# Altium PCB charging-module.PcbDoc
Units mil, origin at the board's own origin, x right, y up, seen from the top; angles counter-clockwise.
Board outline 1935 x 1545 mil, 2 copper layers (Top Layer, Bottom Layer); 35 components, 24 nets, 143 pads, 27 vias.
Unrouted connection lines stored in the file: 28.
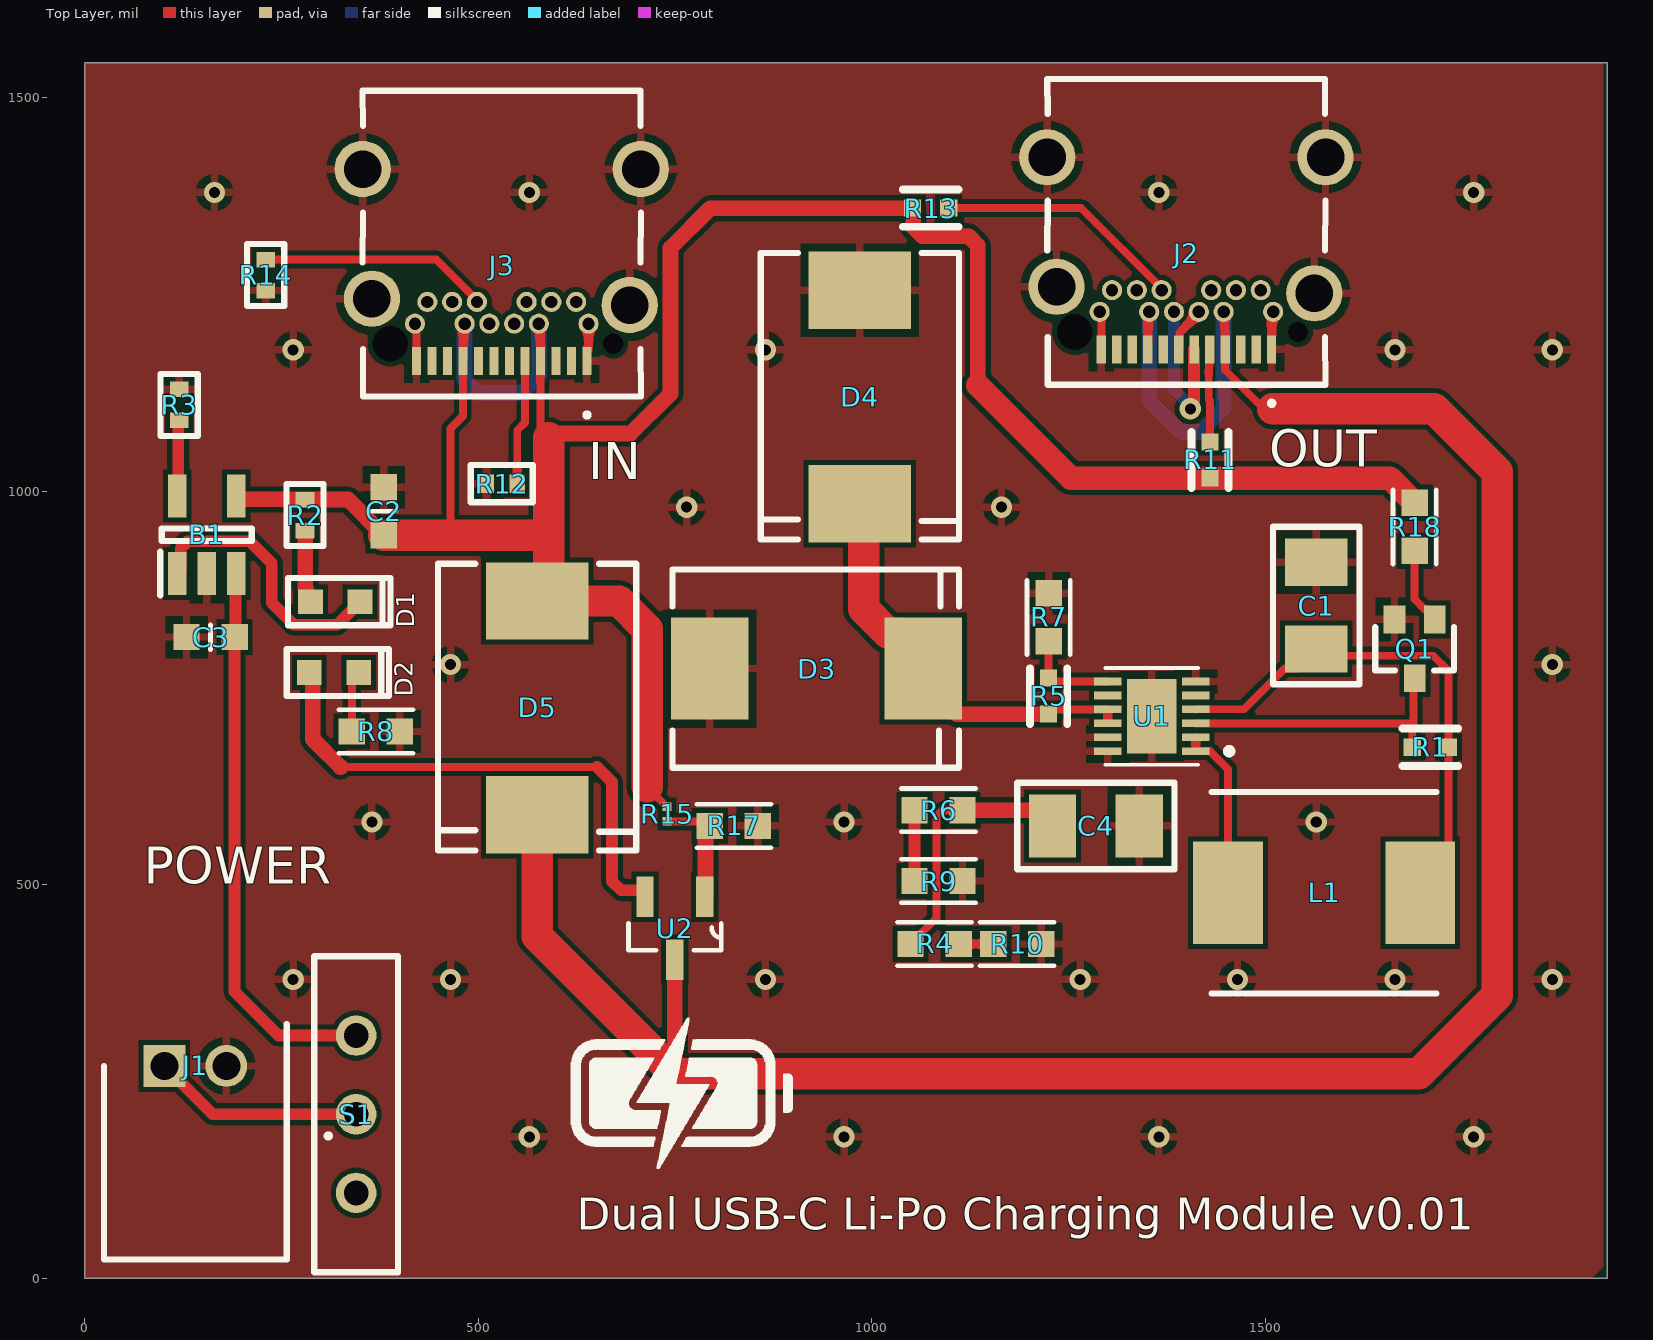
[diagram p0: Top Layer view]
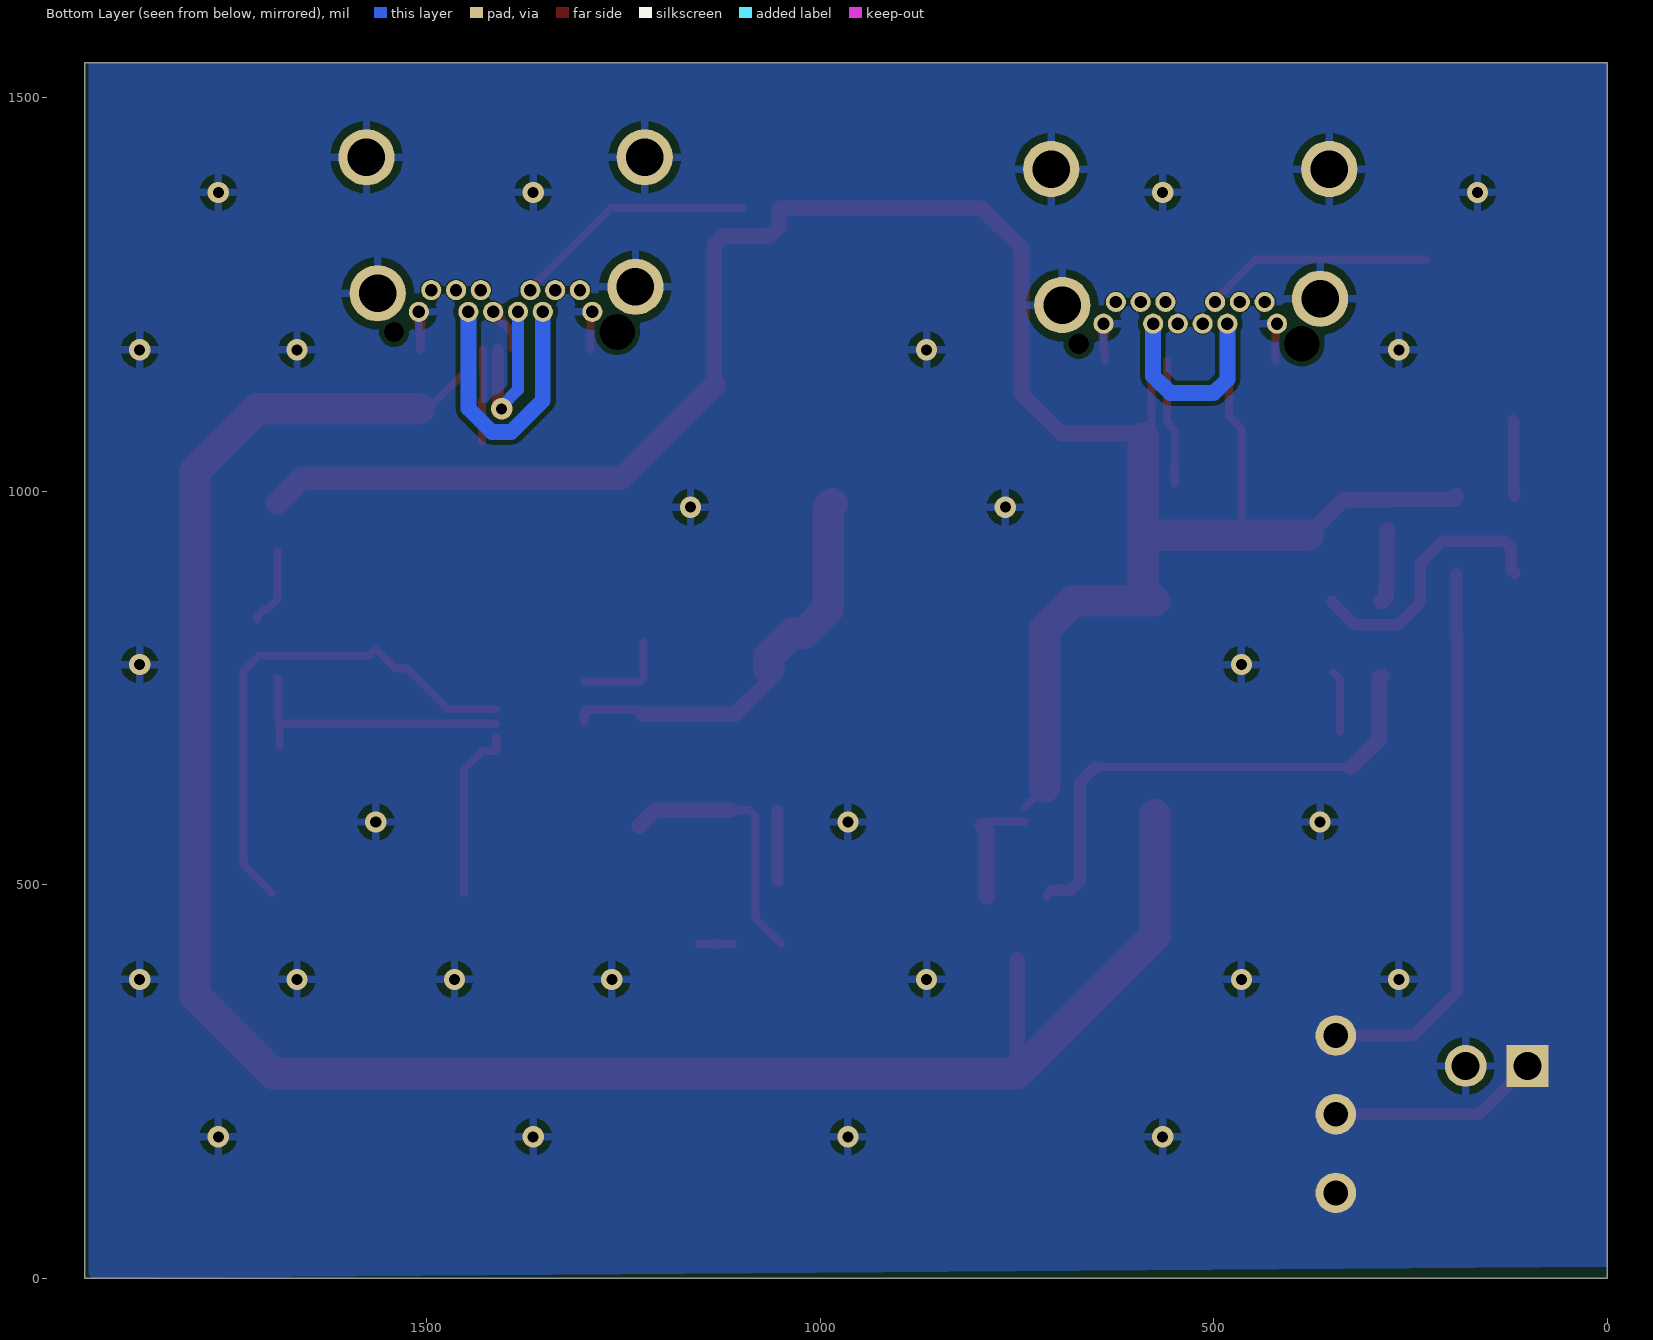
[diagram p1: Bottom Layer view, seen from below]
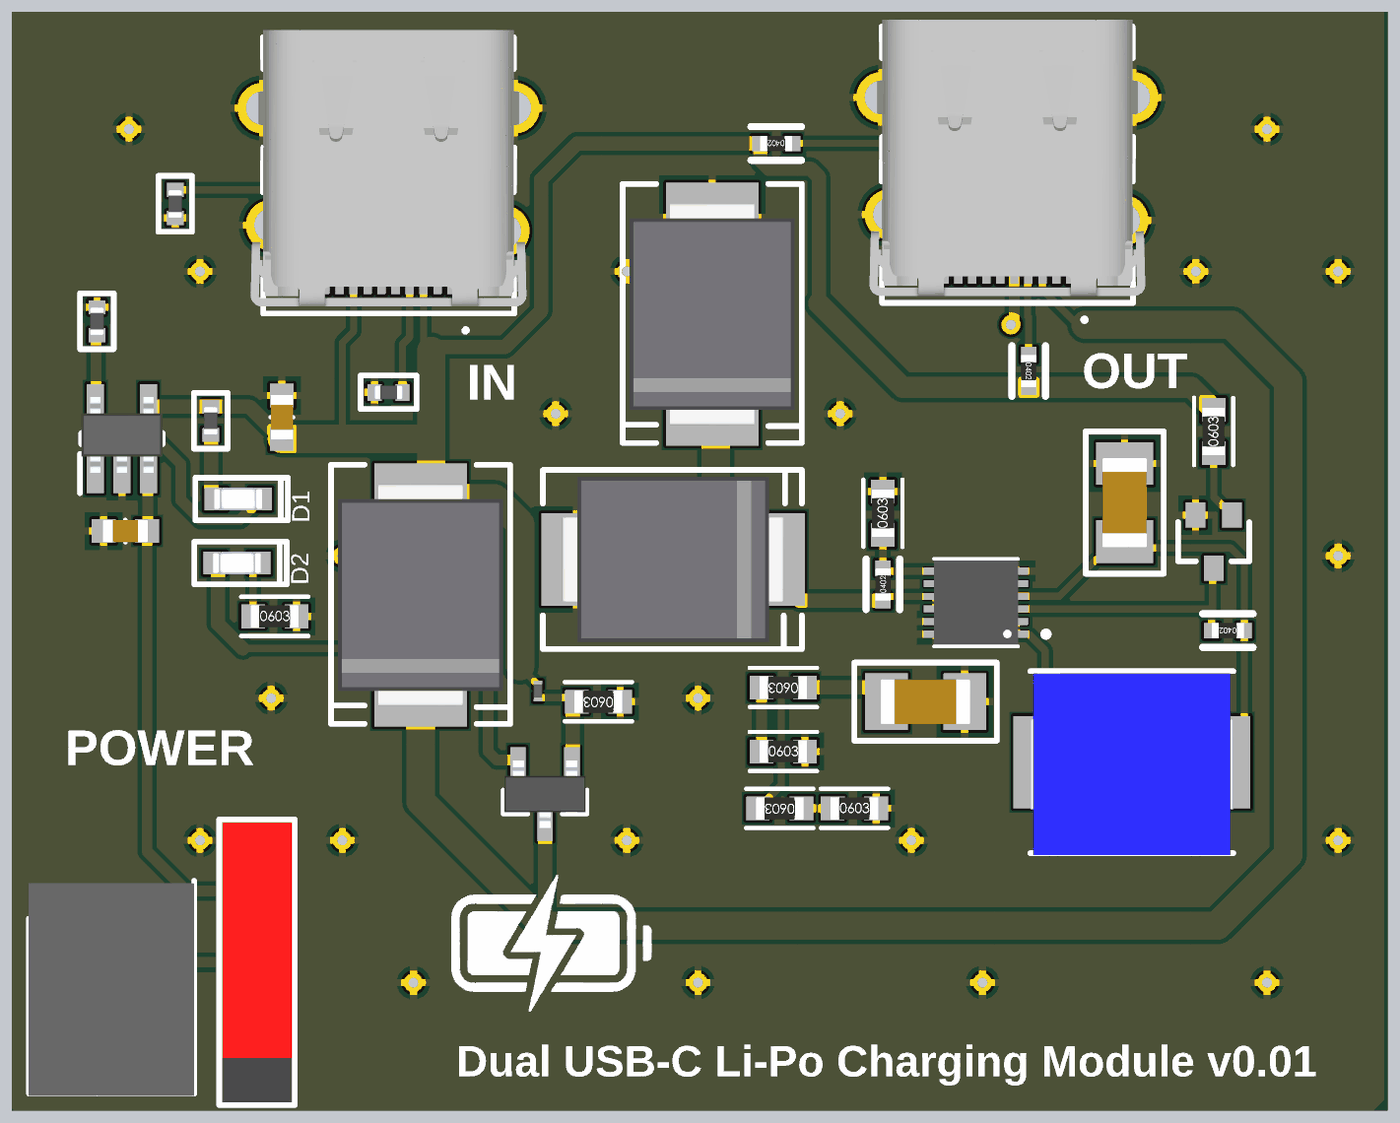
[diagram p2: 3D render of the assembled board from above, using the file's embedded part models]

## Layer stack, top to bottom
Top Solder: solder mask 0.4, Solder Resist, Dk 3.5
Top Layer: signal copper 1.4
Dielectric 1: dielectric 12.6, FR-4, Dk 4.8
Bottom Layer: signal copper 1.4
Bottom Solder: solder mask 0.4, Solder Resist, Dk 3.5

## Board outline
0,0 1935,0 1935,1545 0,1545

## Design rules (kind name [scope] priority, off if disabled: settings)
Clearance Clearance_2 [InComponent('J3') vs InComponent('J3')] p1: gap=3 ignorepadtopadclearanceinfootprint=FALSE
Clearance Clearance_1 [InComponent('J2') vs InComponent('J2')] p2: gap=3 ignorepadtopadclearanceinfootprint=FALSE
Clearance [All] p3: gap=6 ignorepadtopadclearanceinfootprint=FALSE
HoleSize [All] p1: absolutevalues=TRUE maxlimit=150 minlimit=10 maxpercent=80.000 minpercent=20.000
HoleToHoleClearance [All] p1: gap=6 allowstackedmicrovias=TRUE
MinimumSolderMaskSliver [All] p1: minsoldermaskwidth=0.8
PolygonConnect [All] p1: connectstyle=Relief reliefconductorwidth=10 reliefentries=4 polygonreliefangle="90 Angle" airgapwidth=10
RoutingVias [All] p1: holewidth=14 width=27 viastyle="Through Hole" minholewidth=12 minwidth=24 maxholewidth=30 maxwidth=50
SMDNeckDown [All] p1: percent=150.000
SilkToSilkClearance [All] p1: silktosilkclearance=5
SilkToSolderMaskClearance [IsPad] p1: minsilkscreentomaskgap=5 clearancetoexposedcopper=TRUE
SolderMaskExpansion [All] p1: expansion=4 istentingtop=FALSE
UnRoutedNet [InNet('GND')] p1 off:
Width SYS [InNet('SYS')] p1: maxlimit=40 minlimit=10 preferedwidth=20
Width +5 [InNet('+5')] p2: maxlimit=40 minlimit=10 preferedwidth=20 minimp=50.000000 maximp=50.000000 favimp=50.000000
Width 5VIN [InNet('5VIN')] p3: maxlimit=40 minlimit=10 preferedwidth=20 minimp=50.000000 maximp=50.000000 favimp=50.000000
Width [All] p4: maxlimit=20 minlimit=10 preferedwidth=15 minimp=50.000000 maximp=50.000000 favimp=50.000000
24 further rules are at their usual default settings.

## Components (designator, comment, footprint, x,y, rotation, side; value= is the part's Value field where it differs from the comment)
B1 "MCP73831T-2ATI_OT" SOT95P270X145-5N 155.12,945 r90 top
C1 "22uF, 16V" SMD-1206C 1565,855 r180 top value=22µF
C2 "4.7uF, 10V" SMD-0603C 380,975 r180 top value=4.7µF
C3 "4.7uF, 10V" SMD-0603C 160,815 r270 top value=4.7µF
C4 "22uF, 16V" SMD-1206C 1285,575 r90 top value=22µF
D1 "Green" LED_0603 318.5,860 r180 top
D2 "Red" LED_0603 316.88,770 r180 top
D3 "40V, 1.5A" SMC 930,775 r180 top
D4 "40V, 1.5A" SMC 985,1120 r90 top
D5 "40V 1.5A" SMC 575,725 r90 top
J1 "S2B-PH-K-S_LF__SN_" SHDRRA2W50P0X200_1X2_590X760X480P 101.26,270 r180 top
J2 "217183-0001" 2171830001 1400,1330 r180 top
J3 "217183-0001" 2171830001 530,1315 r180 top
L1 "2.2uH" INDPM7265X300N 1575,490 r180 top
Q1 "2N7002BKW,115" SC70_SOT323 1690,800 r270 top
R1 "750k" SMD-0402-RES 1710,675 r90 top
R2 "1k" R0402 280,970 r270 top
R3 "2k2" R0402 120,1110 r270 top
R4 "75k" SMD-0603-RES 1080,425 r90 top
R5 "750k" SMD-0402-RES 1225,740 r0 top
R6 "75k" SMD-0603-RES 1085,595 r90 top
R7 "100k" SMD-0603-RES 1225,840 r0 top
R8 "4.7k" SMD-0603-RES 370,695 r270 top
R9 "49.9k" SMD-0603-RES 1085,505 r270 top
R10 "49.9k" SMD-0603-RES 1185,425 r270 top
R11 "56k" SMD-0402-RES 1430,1040 r180 top
R12 "5.1k" R0402 530,1010 r180 top
R13 "56k" SMD-0402-RES 1075,1360 r90 top
R14 "5.1k" R0402 230,1275 r270 top
R15 "10k" SMD-0201-RES 740,590 r90 top
R17 "100k" SMD-0603-RES 825,575 r90 top
R18 "100k" SMD-0603-RES 1690,955 r0 top
S1 "450301014042" 450301014042 345,208.66 r90 top
U1 "PAM2401YPADJ" SON45P300X300X63-13N 1355.91,714.29 r180 top
U2 "DMG3415U-7" SOT95P240X105-3N 750,445 r270 top

## Footprints (in the part's own frame and the unit in brackets; to place one, negate y for a bottom-side part, rotate by r counter-clockwise, add the part's x,y. Pads: shape width x height; smd on the part's side, far side on the other; paste and mask are expansions set on the pad)
2171830001 [mm]
  rect 0.3x0.9 smd: A1(-2.75,3.795) A2(-2.25,3.795) A3(-1.75,3.795) A4(-1.25,3.795) A5(-0.75,3.795) A6(-0.25,3.795) A7(0.25,3.795) A8(0.75,3.795) A9(1.25,3.795) A10(1.75,3.795) A11(2.25,3.795) A12(2.75,3.795)
  round 0.65 hole 0.4: B1(2.8,2.585) B2(2.4,1.885) B3(1.6,1.885) B4(1.2,2.585) B5(0.8,1.885) B6(0.4,2.585) B7(-0.4,2.585) B8(-0.8,1.885) B9(-1.2,2.585) B10(-1.6,1.885) B11(-2.4,1.885) B12(-2.8,2.585)
  round 1.815 hole 1.21: MH1(-4.13,1.985) MH2(-4.49,-2.405) MH3(4.49,-2.405) MH4(4.191,1.778)
  round 0.575 hole 1.15 unplated: MH5(3.6,3.235)
  round 0.325 hole 0.65 unplated: MH6(-3.6,3.235)
  silkscreen extent -4.49,-4.94 4.49,5.59, body extent -4.93,-5.19 4.92,4.68, height 2.23
450301014042 [mm]
  round 1.308 hole 0.8: 1(0,0) 2(-2.54,0) 3(2.54,0)
  silkscreen extent -5.1,-1.35 5.1,1.35, body extent -5,-1.25 5,1.25, height 6.4
INDPM7265X300N [mm]
  rect 2.25x3.3 smd: 1(-3.1,0) 2(3.1,0)
  silkscreen extent -3.62,-3.25 3.62,3.25, body extent -3.63,-3.18 3.63,3.32, height 3
LED_0603 [mm]
  rect 0.8x0.8 smd: 1(-0.8,0) 2(0.8,0)
  silkscreen extent -1.78,-0.76 1.52,0.76, body extent -0.85,-0.4 0.85,0.4, height 0.66
R0402 [mm]
  rect 0.5x0.6 smd: 1(-0.5,0) 2(0.5,0)
  silkscreen extent -1,-0.6 1,0.6, body extent -0.5,-0.25 0.5,0.25, height 0.4
SC70_SOT323 [mm]
  rect 0.9x0.7 smd: 1(-0.95,0.65) 2(-0.95,-0.65) 3(0.95,0)
  silkscreen extent -0.7,-1.27 0.7,1.27, body extent -1.27,-1.27 1.27,1.27, height 1.1
SHDRRA2W50P0X200_1X2_590X760X480P [mm]
  rect 1.35x1.35 / inner round 1.35 / far side rect 1.35x1.35 hole 0.9: 1(0,0)
  round 1.35 hole 0.9: 2(-2,0)
  silkscreen extent -3.95,-1.35 1.95,6.25, body extent -3.94,-1.26 1.96,6.34, height 4.8
SMC [mm]
  rect 2.5x3.3 smd: 1(-3.45,0) 2(3.45,0)
  silkscreen extent -4.6,-3.2 4.65,3.2, body extent -3.98,-2.95 3.97,2.95, height 2.3
SMD-0201-RES [mm] "SMD-0201-RES"
  rect 0.28x0.3 smd: 1(-0.235,0) 2(0.235,0)
  body extent -0.3,-0.15 0.3,0.15, height 0.3
SMD-0402-RES [mm]
  rect 0.55x0.55 smd: 1(0,0.584) 2(0,-0.584)
  silkscreen extent -0.6,-0.9 0.6,0.9, body extent -0.28,-0.57 0.27,0.58, height 0.41
SMD-0603-RES [mm]
  rect 0.85x0.85 smd: 1(0,0.775) 2(0,-0.775)
  silkscreen extent -0.7,-1.2 0.7,1.2, body extent -0.4,-0.85 0.4,0.85, height 0.56
SMD-0603C [mm]
  rect 0.85x0.85 smd: 1(0,0.775) 2(0,-0.775)
  silkscreen extent -0.4,0 0.4,0, body extent -0.4,-0.8 0.4,0.8, height 0.9
SMD-1206C [mil]
  rect 80x60 smd: 1(0,55) 2(0,-55)
  silkscreen extent -55,-100 55,100, body extent -31,-63 32,63, height 39
SON45P300X300X63-13N [mm]
  rect 0.89x0.25 smd paste+0 mask+0.05: 1(-1.42,1.125) 2(-1.42,0.675) 3(-1.42,0.225) 4(-1.42,-0.225) 5(-1.42,-0.675) 6(-1.42,-1.125) 7(1.42,-1.125) 8(1.42,-0.675) 9(1.42,-0.225) 10(1.42,0.225) 11(1.42,0.675) 12(1.42,1.125)
  rect 1.6x2.4 smd paste-2 mask+0.102: 13(0,0)
  silkscreen extent -2.6,-1.56 1.5,1.56, body extent -1.5,-1.5 1.5,1.5, height 1
SOT95P240X105-3N [mil]
  rect 52x22 smd: 1(-40,38) 2(-40,-38) 3(40,0)
  silkscreen extent -6,-59 28,59, body extent -47,-57 47,57, height 45
SOT95P270X145-5N [mm]
  rect 1.4x0.6 smd: 1(-1.25,0.95) 2(-1.25,0) 3(-1.25,-0.95) 4(1.25,-0.95) 5(1.25,0.95)
  silkscreen extent -1.95,-1.45 0.2,1.5, body extent -1.22,-1.45 1.48,1.45, height 1.45

## Part data
B1: "Microchip MCP73831T-2ATI/OT, Battery Charge Controller Lithium-Ion/Polymer, 500mA, 5-pin SOT-23", Arrow Part Number=MCP73831T-2ATI/OT, Manufacturer_Name=Microchip, Mouser Part Number=579-MCP73831T-2ATIOT, Arrow Price/Stock=https://www.arrow.com/en/products/mcp73831t-2atiot_2/microchip-technology.html?utm_currency=USD&region=nac, Datasheet Link=https://datasheet.datasheetarchive.com/originals/distributors/Datasheets-DGA15/727147.pdf, Geometry.Height=1.45mm, Manufacturer_Part_Number=MCP73831T-2ATI/OT, Mouser Price/Stock=https://www.mouser.co.uk/ProductDetail/Microchip-Technology/MCP73831T-2ATI-OT?qs=yUQqVecv4qsZbioEUu%252B83g%3D%3D
C1 C4: library part GRM319R61C226ME15D, "CAP CER 22UF 16V X5R 1206", Digi-Key Part Number=490-12763-1-ND, Manufacturer="Murata Electronics North America", Operating Temperature="-55°C ~ 85°C", Package / Case="1206 (3216 Metric)", Ratings=-, Temperature Coefficient=X5R, Tolerance=±20%, Voltage=16V, @ qty=0, Applications="General Purpose", Datasheets=http://www.murata.com/~/media/webrenewal/support/library/catalog/products/capacitor/mlcc/c02e.pdf, Factory Stock=0, Features=-, Height - Seated (Max)=-, Image=//media.digikey.com/Renders/Murata%20Renders/GR331BD72E473KW01L.jpg, Lead Spacing=-, Lead Style=-, Minimum Quantity=1, Mounting Type="Surface Mount, MLCC", Packaging="Cut Tape (CT)", Part Number=GRM319R61C226ME15D, Part Status=Active, Quantity Available=11850, Series=GRM, Size / Dimension="0.126\" L x 0.063\" W (3.20mm x 1.60mm)", Thickness (Max)="0.037\" (0.95mm)", Unit Price (USD)=0.53
C2 C3: library part GRM188R61A475ME15D, "CAP CER 4.7UF 10V X5R 0603", Digi-Key Part Number=490-10478-1-ND, Manufacturer="Murata Electronics North America", Operating Temperature="-55°C ~ 85°C", Package / Case="0603 (1608 Metric)", Ratings=-, Temperature Coefficient=X5R, Tolerance=±20%, Voltage=10V, @ qty=0, Applications="General Purpose", Datasheets=http://www.murata.com/~/media/webrenewal/support/library/catalog/products/capacitor/mlcc/c02e.pdf, Factory Stock=0, Features="Derating Recommended", Height - Seated (Max)=-, Image=//media.digikey.com/Renders/Murata%20Renders/ZRB-SERIES-0402.jpg, Lead Spacing=-, Lead Style=-, Minimum Quantity=1, Mounting Type="Surface Mount, MLCC", Packaging="Cut Tape (CT)", Part Number=GRM188R61A475ME15D, Part Status=Active, Quantity Available=1695, Series=GRM, Size / Dimension="0.063\" L x 0.031\" W (1.60mm x 0.80mm)", Thickness (Max)="0.035\" (0.90mm)", Unit Price (USD)=0.16
D1: library part "LG L29K-G2J1-24-Z", "LED SMARTLED GREEN 570NM 0603", Current - Limit (Min)=600mA, Current - Output=500mA, Current - Test=2mA, Luminous Flux @ Current - Test="12 mlm", Manufacturer="OSRAM Opto Semiconductors Inc", Millicandela Rating=3.92mcd, Operating Temperature="-40°C ~ 125°C", Package / Case="0603 (1608 Metric)", Supplier Device Package="6-TMLF® (1.6x1.6)", Supplier Part Number=475-2709-1-ND, Voltage - Dropout (Typical)="0.16V @ 500mA", Voltage - Forward (Vf) Typ=1.7V, Voltage - Input="2.6 V ~ 6 V", Voltage - Output=2.5V, .Checked PCB=used, .Checked SCH=used, Category=Optoelectronics, Color=Green, ComponentLink1Description=http://catalog.osram-os.com/catalogue/catalogue.do;jsessionid=32CB61882C089EDD4B6D0A54E7E1F117?act=downloadFile&favOid=020000020000138e000100b6, ComponentLink1URL=http://catalog.osram-os.com/catalogue/catalogue.do;jsessionid=32CB61882C089EDD4B6D0A54E7E1F117?act=downloadFile&favOid=020000020000138e000100b6, ComponentLink2Description=http://www.micrel.com/_PDF/mic5353.pdf, ComponentLink2URL=http://www.micrel.com/_PDF/mic5353.pdf, Family="LEDs - <75mA, Discre", Height=0.65mm, Lens Style/Size="Rectangle with Flat Top, 1.3mm x 0.8mm", Lens Type=Diffused, Manufacturer Part Number="LG L29K-G2J1-24-Z", Mounting Type="Surface Mount", Number of Regulators=1, Packaging="Cut Tape (CT)", Price 1k [$]=0.08744, Pricing 1="1=0.16, 10=0.137, 100=0.1093, 250=0.09564, 500=0.08744 (USD)", Regulator Topology="Positive Fixed", RoHS="RoHS Compliant", Size / Dimension="1.70mm L x 0.80mm W", Stock 1=30318, Supplier=Digikey, Supplier 1=Digi-Key, Supplier Part Number 1=475-2709-1-ND, Viewing Angle=160°, Wavelength - Dominant=570nm, Wavelength - Peak=572nm
D2: library part "LS L29K-H1J2-1-Z", "LED SMARTLED RED 630NM 0603 SMD", Current - Test=2mA, Luminous Flux @ Current - Test="20 mlm", Manufacturer="OSRAM Opto Semiconductors Inc", Millicandela Rating=4.95mcd, Package / Case="0603 (1608 Metric)", Supplier Part Number 1=475-1195-1-ND, Voltage - Forward (Vf) Typ=1.8V, .Checked PCB=RF, .Checked SCH=RF, Category=Optoelectronics, Color=Red, ComponentLink1Description=http://catalog.osram-os.com/catalogue/catalogue.do;jsessionid=DB7CFDBAC5AF1E216E45F622E867085A?act=downloadFile&favOid=020000010003f9de000100b6, ComponentLink1URL=http://catalog.osram-os.com/catalogue/catalogue.do;jsessionid=DB7CFDBAC5AF1E216E45F622E867085A?act=downloadFile&favOid=020000010003f9de000100b6, Height=0.65mm, Lens Style/Size="Rectangle with Flat Top, 1.3mm x 0.8mm", Lens Type=Diffused, Manufacturer Part Number="LS L29K-H1J2-1-Z", Mounting Type="Surface Mount", Packaging="Cut Tape (CT)", Pricing 1="1=0.16, 10=0.137, 100=0.1093, 250=0.09564, 500=0.08744 (USD)", RoHS="RoHS Compliant", Size / Dimension="1.70mm L x 0.80mm W", Stock 1=71670, Supplier 1=Digi-Key, Viewing Angle=160°, Wavelength - Dominant=630nm, Wavelength - Peak=643nm
D3 D4 D5: library part B560C-13-F, "Rectifier Diode Schottky Si 40V 1.5A Automotive T/R / Surface Mount Schottky Power Rectifier", Forward Voltage=540mV, Manufacturer=onsemi, Manufacturer Lifecycle Status=ACTIVE, Manufacturer Part Number=NRVBAF1540T3G, Max Forward Surge Current (Ifsm)=40A, Max Operating Temperature=150°C, Max Output Current=1.5A, Min Operating Temperature=-55°C, Peak Reverse Current=800µA, Ratings=AEC-Q101, Reverse Standoff Voltage=40V, Category="Schottky Diodes", China RoHS=Non-Compliant, ComponentLink1Description=https://datasheet.octopart.com:443/NRVBAF1540T3G-onsemi-datasheet-180961703.pdf?src-supplier=IHS, ComponentLink1URL=https://datasheet.octopart.com:443/NRVBAF1540T3G-onsemi-datasheet-180961703.pdf?src-supplier=IHS, ComponentLink2Description=https://datasheet.octopart.com:443/NRVBAF1540T3G-ON-Semiconductor-datasheet-102650802.pdf?src-supplier=Master+Electronics, ComponentLink2URL=https://datasheet.octopart.com:443/NRVBAF1540T3G-ON-Semiconductor-datasheet-102650802.pdf?src-supplier=Master+Electronics, ComponentLink3Description=https://datasheet.octopart.com:443/NRVBAF1540T3G-ON-Semiconductor-datasheet-37175836.pdf?src-supplier=onsemi, ComponentLink3URL=https://datasheet.octopart.com:443/NRVBAF1540T3G-ON-Semiconductor-datasheet-37175836.pdf?src-supplier=onsemi, ComponentLink4Description=http://sigma.octopart.com:80/150627557/rohs_statement/ON-Semiconductor-NRVBAF1540T3G.pdf?src-supplier=Compliance+Statements, ComponentLink4URL=http://sigma.octopart.com:80/150627557/rohs_statement/ON-Semiconductor-NRVBAF1540T3G.pdf?src-supplier=Compliance+Statements, ComponentLink5Description=http://sigma.octopart.com:80/reach_statement/ON-Semiconductor-company-79.pdf?src-supplier=Compliance+Statements, ComponentLink5URL=http://sigma.octopart.com:80/reach_statement/ON-Semiconductor-company-79.pdf?src-supplier=Compliance+Statements, ComponentLink6Description=https://octopart.com:443/opatz8j6/c1?t=SiboxA2vrICSTk_l2maHCDShWHIi_dnvigSOZqUHEWaRMvBFReFfca-ylV2CfBx60NhopUrlbyUfRb0plhK-rDPZJyxJxBvxECjt7U7pX7TXlL1SXtdatVkAjRijYWHia9PvJf6JO-B6pW5cd2TM4srDPegS9EfEUBXkl2e3Vaz4coYvZ5nhW3awRsHlcCyVf5VFJ1EC1fo8-dBxiQb4xV6d213PwR75c_p2Ue5i0AEO_byktMF-82G6jzb2U9pCWOdbcfvpOlxRzmFo7F-uhTTYaGlpuO0YpZojM7WbysfqBZwesdMxqHVpz_SBT9MUnua2eTadQMhvopnjSfcY5pgeaA0LWl9iNhrN_nKdj2nm&src-supplier=Compliance+Statements, ComponentLink6URL=https://octopart.com:443/opatz8j6/c1?t=SiboxA2vrICSTk_l2maHCDShWHIi_dnvigSOZqUHEWaRMvBFReFfca-ylV2CfBx60NhopUrlbyUfRb0plhK-rDPZJyxJxBvxECjt7U7pX7TXlL1SXtdatVkAjRijYWHia9PvJf6JO-B6pW5cd2TM4srDPegS9EfEUBXkl2e3Vaz4coYvZ5nhW3awRsHlcCyVf5VFJ1EC1fo8-dBxiQb4xV6d213PwR75c_p2Ue5i0AEO_byktMF-82G6jzb2U9pCWOdbcfvpOlxRzmFo7F-uhTTYaGlpuO0YpZojM7WbysfqBZwesdMxqHVpz_SBT9MUnua2eTadQMhvopnjSfcY5pgeaA0LWl9iNhrN_nKdj2nm&src-supplier=Compliance+Statements, ComponentLink7Description=https://octopart.com:443/opatz8j6/c1?t=z02q9_x8Us9miko2EDE-luFaRUgcFcVlGAZ_FKVO_QydFW-tKxnMIeR7YIu_UOiXmvAZ45QGgIjcJpalewf3gTmZB6TpoAGva3q68axi7AfK3u1it3nY6HTm8t56JWb4ylWl5mf-Yw1OF6XhZBLBAu0nhZhfPx-6ARupAi6Zp2Q-ljtD1tp4sd0Oxm5olO9ySHjrEB2Nk_IBathEl-5nniyTMcF1q7gAQIUx_ss9NQHKld3CCWBWNOq8a3no0ZPsn8talKA5fqkSjfvXyiHWYLNaa3_PGx8jTK7uAfQ3U7GTw7YhHTil9VR_eHs_IfGCqzxzvH-QuAqEotszV84Rdfjhjx15A-DOV_4hHkZhFa9bvA&src-supplier=Compliance+Statements, ComponentLink7URL=https://octopart.com:443/opatz8j6/c1?t=z02q9_x8Us9miko2EDE-luFaRUgcFcVlGAZ_FKVO_QydFW-tKxnMIeR7YIu_UOiXmvAZ45QGgIjcJpalewf3gTmZB6TpoAGva3q68axi7AfK3u1it3nY6HTm8t56JWb4ylWl5mf-Yw1OF6XhZBLBAu0nhZhfPx-6ARupAi6Zp2Q-ljtD1tp4sd0Oxm5olO9ySHjrEB2Nk_IBathEl-5nniyTMcF1q7gAQIUx_ss9NQHKld3CCWBWNOq8a3no0ZPsn8talKA5fqkSjfvXyiHWYLNaa3_PGx8jTK7uAfQ3U7GTw7YhHTil9VR_eHs_IfGCqzxzvH-QuAqEotszV84Rdfjhjx15A-DOV_4hHkZhFa9bvA&src-supplier=Compliance+Statements, Country of Origin=Malaysia, Export Control Classification Number (ECCN) Code=EAR99, Harmonized Tariff Schedule (HTS) Code=8541.10.00.80, Introduction Date=2012-07-31, Lifecycle Status=Production, Number of Elements=1, Number of Terminals=2, Pricing 1="1667=0.38462, 3334=0.37037, 6668=0.36268, 13336=0.36081, 26672=0.35894 (USD)", REACH SVHC=Affected, RoHS=Compliant, Stock 1=55000, Supplier 1=Avnet, Supplier Part Number 1=NRVBAF1540T3G
J1: "PH-2.0mm Header side entry 2 way JST PH Series, Series Number S2B, 2mm Pitch 2 Way 1 Row Right Angle PCB Header, Through Hole Termination, 2A", Arrow Part Number=S2B-PH-K-S(LF)(SN), Manufacturer_Name="JST (JAPAN SOLDERLESS TERMINALS)", Mouser Part Number=306-S2BPHKSLFSNPP, Arrow Price/Stock=https://www.arrow.com/en/products/s2b-ph-k-s-lf-sn/jst-manufacturing.html?utm_currency=USD&region=europe, Datasheet Link=http://uk.rs-online.com/web/p/products/8201494, Geometry.Height=4.8mm, Manufacturer_Part_Number=S2B-PH-K-S(LF)(SN), Mouser Price/Stock=https://www.mouser.co.uk/ProductDetail/JST-Commercial/S2B-PH-K-SLFSN?qs=cdbOS8ANM9A5Ie4gXeMjTA%3D%3D
J2 J3: "Connector USB Type C Hybrid Female 24Positions 0.5mm Right Angle Through Hole Embossed T/R", Manufacturer_Name=Molex, Mouser Part Number=538-217183-0001, Datasheet Link=https://www.molex.com/pdm_docs/sd/2171830001_sd.pdf, Geometry.Height=3.36mm, Manufacturer_Part_Number=217183-0001, Mouser Price/Stock=https://www.mouser.co.uk/ProductDetail/Molex/217183-0001?qs=DRkmTr78QAQVjf9fqpgsow%3D%3D
L1: library part Inductor, "Inductor Power Shielded Wirewound 2.2uH 20% 1MHz Metal 6.8A 0.0193Ohm DCR T/R", Case/Package=Nonstandard, Current Rating=6A, DC Current=6.8A, DC Resistance (DCR)=19.3mΩ, Inductance=2.2µH, Manufacturer=Sumida, Manufacturer Part Number=CDMC6D28NP-2R2MC, Max DC Current=7.6A, Max Operating Temperature=125°C, Min Operating Temperature=-40°C, Supplier Part Number 1=308-1569-1-ND, Test Frequency=1MHz, Tolerance=20%, Category="Fixed Inductors", ComponentLink1Description=https://datasheet.octopart.com:443/CDMC6D28NP-2R2MC-Sumida-datasheet-181250798.pdf?src-supplier=IHS, ComponentLink1URL=https://datasheet.octopart.com:443/CDMC6D28NP-2R2MC-Sumida-datasheet-181250798.pdf?src-supplier=IHS, ComponentLink2Description=https://datasheet.octopart.com:443/CDMC6D28NP-2R2MC-Sumida-datasheet-12515277.pdf?src-supplier=_legacy+Avnet, ComponentLink2URL=https://datasheet.octopart.com:443/CDMC6D28NP-2R2MC-Sumida-datasheet-12515277.pdf?src-supplier=_legacy+Avnet, ComponentLink3Description=https://datasheet.octopart.com:443/CDMC6D28NP-2R2MC-Sumida-datasheet-8324284.pdf?src-supplier=_legacy+Avnet, ComponentLink3URL=https://datasheet.octopart.com:443/CDMC6D28NP-2R2MC-Sumida-datasheet-8324284.pdf?src-supplier=_legacy+Avnet, ComponentLink4Description=https://datasheet.octopart.com:443/CDMC6D28NP-2R2MC-Sumida-datasheet-32609285.pdf?src-supplier=Future+Electronics, ComponentLink4URL=https://datasheet.octopart.com:443/CDMC6D28NP-2R2MC-Sumida-datasheet-32609285.pdf?src-supplier=Future+Electronics, Core Material="Composite, Metal", Depth=6.7mm, Export Control Classification Number (ECCN) Code=EAR99, Harmonized Tariff Schedule (HTS) Code=8504.50.80.00, Height=3mm, Height - Seated (Max)=2.9972mm, Introduction Date=2008-01-30, Lead Free="Lead Free", Length=7.25mm, Lifecycle Status=Obsolete, LTB Date=2025-12-31, LTD Date=2026-04-30, Max Current Rating=6A, Military Standard=Not, Mount="Surface Mount", Number of Circuits=1, Number of Terminals=2, Packaging=Digi-Reel®, Pricing 1="1=0.95, 10=0.777, 25=0.7192, 50=0.6778, 100=0.6391 (USD)", Radiation Hardening=No, RoHS=Compliant, Saturation Current=6A, Schedule B="8504500000, 8504500000|8504500000|8504500000|8504500000|8504500000", Shielding=Shielded, Stock 1=167, Supplier 1=DigiKey, Termination=SMD/SMT, Width=6.5mm
Q1: "MOSFET N-CH 60V 310MA SOT323", Current - Continuous Drain (Id) @ 25° C=310mA, Drain to Source Voltage (Vdss)=60V, Input Capacitance (Ciss) @ Vds="50pF @ 10V", Manufacturer="NXP Semiconductors", Package / Case="SC-70, SOT-323", Power - Max=275mW, Supplier Device Package=SC-70, Supplier Part Number 1=568-5980-1-ND, .Checked PCB=RF, .Checked SCH=RF, Category="Discrete Semiconductor Products", ComponentLink1Description=http://www.nxp.com/documents/data_sheet/2N7002BKW.pdf, ComponentLink1URL=http://www.nxp.com/documents/data_sheet/2N7002BKW.pdf, FET Feature="Logic Level Gate", FET Type="MOSFET N-Channel, Metal Oxide", Gate Charge (Qg) @ Vgs="0.6nC @ 4.5V", Manufacturer Part Number=2N7002BKW,115, Mounting Type="Surface Mount", Packaging="Cut Tape (CT)", Pricing 1="1=0.39, 10=0.354, 25=0.2548, 100=0.1983, 250=0.12456, 500=0.10616, 1000=0.07233 (USD)", Rds On (Max) @ Id, Vgs="1.6 Ohm @ 500mA, 10V", RoHS="RoHS Compliant", Stock 1=15666, Supplier 1=Digi-Key, Vgs(th) (Max) @ Id="2.1V @ 250µA"
R1 R5: library part ERJ-2RKF7503X, "RES SMD 750K OHM 1% 1/10W 0402", Digi-Key Part Number=P750KLCT-ND, Manufacturer="Panasonic Electronic Components", Operating Temperature="-55°C ~ 155°C", Package / Case="0402 (1005 Metric)", Power (Watts)="0.1W, 1/10W", Supplier Device Package=0402, Temperature Coefficient=±100ppm/°C, Tolerance=±1%, @ qty=1500, Composition="Thick Film", Datasheets=http://industrial.panasonic.com/www-cgi/jvcr13pz.cgi?E+PZ+3+AOA0002+ERJ2RKF7503X+7+WW, Factory Stock=0, Failure Rate=-, Features="Automotive AEC-Q200", Height - Seated (Max)="0.016\" (0.40mm)", Image=//media.digikey.com/Photos/Panasonic%20Photos/ERJ-PA2-Series.jpg, Minimum Quantity=1, Number of Terminations=2, Packaging="Cut Tape (CT)", Part Number=ERJ-2RKF7503X, Part Status=Active, Quantity Available=78807, Series=ERJ, Size / Dimension="0.039\" L x 0.020\" W (1.00mm x 0.50mm)", Unit Price (USD)=0.00496
R2: library part RC0402FR-071KL, "RES 1.00K OHM 1/16W 1% 0402 SMD", Manufacturer=Yageo, Package / Case="0402 (1005 Metric)", Power (Watts)="0.063W, 1/16W", Resistance (Ohms)=1K, Supplier Part Number=311-1.00KLRCT-ND, Temperature Coefficient=±100ppm/°C, Tolerance=±1%, .Checked PCB=used, .Checked SCH=used, Category=Resistors, ComponentLink1Description=http://www.yageo.com/documents/recent/PYu-RC0402_51_RoHS_L_6.pdf, ComponentLink1URL=http://www.yageo.com/documents/recent/PYu-RC0402_51_RoHS_L_6.pdf, Composition="Thick Film", Features=-, Height="0.016\" (0.40mm)", Manufacturer Part Number=RC0402FR-071KL, Number of Terminations=2, Packaging="Cut Tape (CT)", Price 1k [$]=0.01421, Pricing 1="10=0.014, 50=0.0104, 100=0.0079, 250=0.00584, 500=0.00432, 1000=0.00288 (USD)", RoHS="RoHS Compliant", Size / Dimension="0.039\" L x 0.020\" W (1.00mm x 0.50mm)", Stock 1=1753477, Supplier=Digikey, Supplier 1=Digi-Key, Supplier Part Number 1=311-1.00KLRCT-ND
R3: library part RC0402FR-072K2L, "RES 2.20K OHM 1/16W 1% 0402 SMD", Manufacturer=Yageo, Package / Case="0402 (1005 Metric)", Power (Watts)="0.063W, 1/16W", Resistance (Ohms)=2.2K, Supplier Part Number=311-2.20KLRCT-ND, Temperature Coefficient=±100ppm/°C, Tolerance=±1%, .Checked PCB=used, .Checked SCH=used, Category=Resistors, ComponentLink1Description=http://www.yageo.com/documents/recent/PYu-RC0402_51_RoHS_L_6.pdf, ComponentLink1URL=http://www.yageo.com/documents/recent/PYu-RC0402_51_RoHS_L_6.pdf, Composition="Thick Film", Features=-, Height="0.016\" (0.40mm)", Manufacturer Part Number=RC0402FR-072K2L, Number of Terminations=2, Packaging="Cut Tape (CT)", Price 1k [$]=0.01421, Pricing 1="10=0.014, 50=0.0104, 100=0.0079, 250=0.00584, 500=0.00432, 1000=0.00288 (USD)", RoHS="RoHS Compliant", Size / Dimension="0.039\" L x 0.020\" W (1.00mm x 0.50mm)", Stock 1=195154, Supplier=Digikey, Supplier 1=Digi-Key, Supplier Part Number 1=311-2.20KLRCT-ND
R4 R6: library part ERJ-3EKF7502V, "RES SMD 75K OHM 1% 1/10W 0603", Digi-Key Part Number=P75.0KHCT-ND, Manufacturer="Panasonic Electronic Components", Operating Temperature="-55°C ~ 155°C", Package / Case="0603 (1608 Metric)", Power (Watts)="0.1W, 1/10W", Supplier Device Package=0603, Temperature Coefficient=±100ppm/°C, Tolerance=±1%, @ qty=1500, Composition="Thick Film", Datasheets=http://industrial.panasonic.com/www-cgi/jvcr13pz.cgi?E+PZ+3+AOA0002+ERJ3EKF7502V+7+WW, Factory Stock=0, Failure Rate=-, Features="Automotive AEC-Q200", Height - Seated (Max)="0.022\" (0.55mm)", Image=//media.digikey.com/Photos/Panasonic%20Photos/MFG_ERJ-P6W%20Series.jpg, Minimum Quantity=1, Number of Terminations=2, Packaging="Cut Tape (CT)", Part Number=ERJ-3EKF7502V, Part Status=Active, Quantity Available=63796, Series=ERJ, Size / Dimension="0.063\" L x 0.031\" W (1.60mm x 0.80mm)", Unit Price (USD)=0.00379
R7 R17 R18: library part ERJ-3EKF1003V, "RES SMD 100K OHM 1% 1/10W 0603", Digi-Key Part Number=P100KHCT-ND, Manufacturer="Panasonic Electronic Components", Operating Temperature="-55°C ~ 155°C", Package / Case="0603 (1608 Metric)", Power (Watts)="0.1W, 1/10W", Supplier Device Package=0603, Temperature Coefficient=±100ppm/°C, Tolerance=±1%, @ qty=1500, Composition="Thick Film", Datasheets=http://industrial.panasonic.com/www-cgi/jvcr13pz.cgi?E+PZ+3+AOA0002+ERJ3EKF1003V+7+WW, Factory Stock=0, Failure Rate=-, Features="Automotive AEC-Q200", Height - Seated (Max)="0.022\" (0.55mm)", Image=//media.digikey.com/Photos/Panasonic%20Photos/MFG_ERJ-P6W%20Series.jpg, Minimum Quantity=1, Number of Terminations=2, Packaging="Cut Tape (CT)", Part Number=ERJ-3EKF1003V, Part Status=Active, Quantity Available=2179804, Series=ERJ, Size / Dimension="0.063\" L x 0.031\" W (1.60mm x 0.80mm)", Unit Price (USD)=0.00379
R8: library part ERJ-3EKF4701V, "RES SMD 4.7K OHM 1% 1/10W 0603", Digi-Key Part Number=P4.70KHCT-ND, Manufacturer="Panasonic Electronic Components", Operating Temperature="-55°C ~ 155°C", Package / Case="0603 (1608 Metric)", Power (Watts)="0.1W, 1/10W", Supplier Device Package=0603, Temperature Coefficient=±100ppm/°C, Tolerance=±1%, @ qty=1500, Composition="Thick Film", Datasheets=http://industrial.panasonic.com/www-cgi/jvcr13pz.cgi?E+PZ+3+AOA0002+ERJ3EKF4701V+7+WW, Factory Stock=0, Failure Rate=-, Features="Automotive AEC-Q200", Height - Seated (Max)="0.022\" (0.55mm)", Image=//media.digikey.com/Photos/Panasonic%20Photos/MFG_ERJ-P6W%20Series.jpg, Minimum Quantity=1, Number of Terminations=2, Packaging="Cut Tape (CT)", Part Number=ERJ-3EKF4701V, Part Status=Active, Quantity Available=999380, Series=ERJ, Size / Dimension="0.063\" L x 0.031\" W (1.60mm x 0.80mm)", Unit Price (USD)=0.00379
R9 R10: library part ERJ-3EKF4992V, "RES SMD 49.9K OHM 1% 1/10W 0603", Digi-Key Part Number=P49.9KHCT-ND, Manufacturer="Panasonic Electronic Components", Operating Temperature="-55°C ~ 155°C", Package / Case="0603 (1608 Metric)", Power (Watts)="0.1W, 1/10W", Supplier Device Package=0603, Temperature Coefficient=±100ppm/°C, Tolerance=±1%, @ qty=1500, Composition="Thick Film", Datasheets=http://industrial.panasonic.com/www-cgi/jvcr13pz.cgi?E+PZ+3+AOA0002+ERJ3EKF4992V+7+WW, Factory Stock=0, Failure Rate=-, Features="Automotive AEC-Q200", Height - Seated (Max)="0.022\" (0.55mm)", Image=//media.digikey.com/Photos/Panasonic%20Photos/MFG_ERJ-P6W%20Series.jpg, Minimum Quantity=1, Number of Terminations=2, Packaging="Cut Tape (CT)", Part Number=ERJ-3EKF4992V, Part Status=Active, Quantity Available=951405, Series=ERJ, Size / Dimension="0.063\" L x 0.031\" W (1.60mm x 0.80mm)", Unit Price (USD)=0.00379
R11 R13: library part ERJ-2GEJ563X, "RES SMD 56K OHM 5% 1/10W 0402", Digi-Key Part Number=P56KJCT-ND, Manufacturer="Panasonic Electronic Components", Operating Temperature="-55°C ~ 155°C", Package / Case="0402 (1005 Metric)", Power (Watts)="0.1W, 1/10W", Supplier Device Package=0402, Temperature Coefficient=±200ppm/°C, Tolerance=±5%, @ qty=1500, Composition="Thick Film", Datasheets=http://industrial.panasonic.com/www-cgi/jvcr13pz.cgi?E+PZ+3+AOA0001+ERJ2GEJ563X+7+WW, Factory Stock=0, Failure Rate=-, Features="Automotive AEC-Q200", Height - Seated (Max)="0.016\" (0.40mm)", Image=//media.digikey.com/Photos/Panasonic%20Photos/ERJ-PA2-Series.jpg, Minimum Quantity=1, Number of Terminations=2, Packaging="Cut Tape (CT)", Part Number=ERJ-2GEJ563X, Part Status=Active, Quantity Available=208344, Series=ERJ, Size / Dimension="0.039\" L x 0.020\" W (1.00mm x 0.50mm)", Unit Price (USD)=0.00350
R12 R14: library part ERJ-8ENF5101V, "RES SMD 5.1K OHM 1% 1/4W 1206", Digi-Key Part Number=P5.10KFCT-ND, Manufacturer="Panasonic Electronic Components", Operating Temperature="-55°C ~ 155°C", Package / Case="1206 (3216 Metric)", Power (Watts)="0.25W, 1/4W", Supplier Device Package=1206, Temperature Coefficient=±100ppm/°C, Tolerance=±1%, @ qty=1500, Composition="Thick Film", Datasheets=http://industrial.panasonic.com/www-cgi/jvcr13pz.cgi?E+PZ+3+AOA0002+ERJ8ENF5101V+7+WW, Factory Stock=0, Failure Rate=-, Features="Automotive AEC-Q200", Height - Seated (Max)="0.028\" (0.70mm)", Image=//media.digikey.com/Renders/Panasonic%20Renders/ERJ-1206%20Pkg.jpg, Minimum Quantity=1, Number of Terminations=2, Packaging="Cut Tape (CT)", Part Number=ERJ-8ENF5101V, Part Status=Active, Quantity Available=70747, Series=ERJ, Size / Dimension="0.126\" L x 0.063\" W (3.20mm x 1.60mm)", Unit Price (USD)=0.00933
R15: library part ERJ-1GEF1002C, "RES SMD 10K OHM 1% 1/20W 0201", Digi-Key Part Number=P10.0KABCT-ND, Manufacturer="Panasonic Electronic Components", Operating Temperature="-55°C ~ 125°C", Package / Case="0201 (0603 Metric)", Power (Watts)="0.05W, 1/20W", Supplier Device Package=0201, Temperature Coefficient=±200ppm/°C, Tolerance=±1%, @ qty=1500, Composition="Thick Film", Datasheets=//media.digikey.com/pdf/Data%20Sheets/Panasonic%20Resistors%20Thermistors%20PDFs/ERJ_G,R,E_Rev08.pdf, Factory Stock=0, Failure Rate=-, Features=-, Height - Seated (Max)="0.010\" (0.26mm)", Image=//media.digikey.com/Renders/Panasonic%20Renders/ERJ-0201%20Pkg.jpg, Minimum Quantity=1, Number of Terminations=2, Packaging="Cut Tape (CT)", Part Number=ERJ-1GEF1002C, Part Status=Active, Quantity Available=2802306, Series=ERJ, Size / Dimension="0.024\" L x 0.012\" W (0.60mm x 0.30mm)", Unit Price (USD)=0.00933
S1: Package=None, Availability=Unavailable, MF="{'manufacturer': u'W\xfcrth Elektronik'}", MP=450301014042, Price=None
U1: "Conv DC-DC 0.9V to 4.75V Synchronous Step Up Single-Out 2.5V to 5V 12-Pin UDFN EP T/R", Case/Package=DFN, Manufacturer="Diodes Inc.", Max Input Voltage=4.75V, Max Operating Temperature=85°C, Max Output Voltage=5V, Max Switching Frequency=1MHz, Min Input Voltage=900mV, Min Operating Temperature=-40°C, Min Output Voltage=2.5V, Nominal Input Voltage=3.3V, Operating Supply Current=1µA, Output Current=3A, Temperature Grade=Industrial, Category="Voltage Regulators - Switching", China RoHS=Compliant, ComponentLink1Description=https://datasheet.octopart.com:443/PAM2401YPADJ-Diodes-Inc.-datasheet-44660043.pdf?src-supplier=IHS, ComponentLink1URL=https://datasheet.octopart.com:443/PAM2401YPADJ-Diodes-Inc.-datasheet-44660043.pdf?src-supplier=IHS, ComponentLink2Description=https://sigma.octopart.com:443/141243533/technical_drawing/Diodes-Inc.-PAM2401YPADJ.pdf?src-supplier=Diodes+Inc+SCT, ComponentLink2URL=https://sigma.octopart.com:443/141243533/technical_drawing/Diodes-Inc.-PAM2401YPADJ.pdf?src-supplier=Diodes+Inc+SCT, Height - Seated (Max)=630µm, Length=3mm, Lifecycle Status=Production, Manufacturer Part Number=PAM2401YPADJ, Min Supply Voltage=900mV, Mount="Surface Mount", Nominal Output Voltage=5V, Number of Circuits=1, Number of Outputs=1, Number of Pins=12, Number of Terminals=12, Output Configuration=Positive, Output Type=Adjustable, Packaging="Tape & Reel (TR)", Pricing 1="3000=0.435, 6000=0.43, 9000=0.425, 15000=0.415 (USD)", REACH SVHC=Unaffected, RoHS=Compliant, Schedule B="8542390000, 8542390000|8542390000|8542390000|8542390000|8542390000|8542390000|8542390000|8542390000|8542390000|8542390000|8542390000|8542390000|8542390000|8542390000|8542390000|8542390000|8542390000|8542390000|8542390000|8542390000|8542390000|8542390000|8542390000|85", Stock 1=3000, Supplier 1="Future Electronics", Supplier Part Number 1=PAM2401YPADJ, Switching Frequency=1MHz, Synchronous Rectifier=Yes, Terminal Pitch=450µm, Topology=Boost, Width=3mm
U2: "P-ch Mosfet 20V 4A 39MΩ@4A, 4.5V 9.1NC@4.5V 294PF@10V SOT-23-3 SMD 2.9MM × 1.3MM × 1.03MM", Case/Package=SOT-23, Continuous Drain Current (ID)=4A, Drain to Source Breakdown Voltage=-20V, Drain to Source Resistance=42.5mΩ, Gate to Source Voltage (Vgs)=8V, Input Capacitance=294pF, Manufacturer="Diodes Inc.", Max Junction Temperature (Tj)=150°C, Max Power Dissipation=900mW, Min Breakdown Voltage=20V, Min Operating Temperature=-55°C, Threshold Voltage=-550mV, Category=MOSFETs, China RoHS=Compliant, ComponentLink1Description=https://datasheet.octopart.com:443/DMG3415U-7-Diodes-Inc.-datasheet-180552899.pdf?src-supplier=IHS, ComponentLink1URL=https://datasheet.octopart.com:443/DMG3415U-7-Diodes-Inc.-datasheet-180552899.pdf?src-supplier=IHS, ComponentLink2Description=https://datasheet.octopart.com:443/DMG3415U-7-Diodes-Inc.-datasheet-41567333.pdf?src-supplier=Newark, ComponentLink2URL=https://datasheet.octopart.com:443/DMG3415U-7-Diodes-Inc.-datasheet-41567333.pdf?src-supplier=Newark, ComponentLink3Description=https://datasheet.octopart.com:443/DMG3415U-7-Diodes-Inc.-datasheet-12530588.pdf?src-supplier=Newark, ComponentLink3URL=https://datasheet.octopart.com:443/DMG3415U-7-Diodes-Inc.-datasheet-12530588.pdf?src-supplier=Newark, ComponentLink4Description=https://datasheet.octopart.com:443/DMG3415U-7-Diodes-Inc.-datasheet-10027536.pdf?src-supplier=Newark, ComponentLink4URL=https://datasheet.octopart.com:443/DMG3415U-7-Diodes-Inc.-datasheet-10027536.pdf?src-supplier=Newark, ComponentLink5Description=https://sigma.octopart.com:443/138706058/technical_drawing/Diodes-Inc.-DMG3415U-7.pdf?src-supplier=Upverter, ComponentLink5URL=https://sigma.octopart.com:443/138706058/technical_drawing/Diodes-Inc.-DMG3415U-7.pdf?src-supplier=Upverter, ComponentLink6Description=https://datasheet.octopart.com:443/DMG3415U-7-Diodes-Inc.-datasheet-14060167.pdf?src-supplier=iiiC, ComponentLink6URL=https://datasheet.octopart.com:443/DMG3415U-7-Diodes-Inc.-datasheet-14060167.pdf?src-supplier=iiiC, ComponentLink7Description=https://datasheet.octopart.com:443/DMG3415U-7-Diodes-Inc.-datasheet-11766085.pdf?src-supplier=Future+Electronics, ComponentLink7URL=https://datasheet.octopart.com:443/DMG3415U-7-Diodes-Inc.-datasheet-11766085.pdf?src-supplier=Future+Electronics, ComponentLink8Description=http://sigma.octopart.com:80/15540767/rohs_statement/Diodes-Inc.-DMG3415U-7.pdf?src-supplier=Compliance+Statements, ComponentLink8URL=http://sigma.octopart.com:80/15540767/rohs_statement/Diodes-Inc.-DMG3415U-7.pdf?src-supplier=Compliance+Statements, Contact Plating=Tin, Drain to Source Voltage (Vdss)=-20V, Element Configuration=Single, Fall Time=393ns, Height=1.1mm, Lead Free="Lead Free", Length=2.9mm, Lifecycle Status=NRND, Manufacturer Part Number=DMG3415U-7, Max Operating Temperature=150°C, Mount="Surface Mount", Nominal Vgs=-550mV, Number of Channels=1, Number of Elements=1, Number of Pins=3, Number of Terminals=3, Packaging="Cut Tape", Power Dissipation=900mW, Pricing 1="3000=0.151, 6000=0.15, 9000=0.149, 12000=0.148, 15000=0.145 (USD)", Radiation Hardening=No, Rds On Max=39mΩ, REACH SVHC=Unaffected, Resistance=42.5mΩ, Rise Time=117ns, RoHS=Compliant, Schedule B="8541210080, 8541210080|8541210080|8541210080|8541210080|8541210080|8541210080|8541210080|8541210080|8541210080|8541210080|8541210080|8541210080|8541210080|8541210080|8541210080|8541210080|8541210080|8541210080|8541210080|8541210080|8541210080|8541210080|8541210080|85", Stock 1=3000, Supplier 1="Future Electronics", Supplier Part Number 1=DMG3415U-7, Turn-Off Delay Time=795ns, Turn-On Delay Time=71ns, Weight=7.994566mg, Width=1.3mm

## Via types
v1: diameter 27, hole 14, Top Layer to Bottom Layer, 27 vias

## Nets (pads, with @x,y where several pads share a name; then routed paths per layer and width w, separated by ;. In a path a pad name is that pad's centre, name@x,y a point inside that pad or via, vN(x,y) a via of type N, cw(c..) or ccw(c..) an arc to the next point about the centre after c; other vN are vias at no path point)
5VIN: B1.4 C2.1 D5.2 J3.A4 J3.A9 J3.B4 J3.B9 R2.1 R11.1 R13.1 R15.2 R18.1 | length 3305.7
  Top Layer w10: 465,944.49 465,1080 480.79,1095.79 J3.A9 481.69,1166.5 481.69,1212.17 J3.B4 ; J3.B9 579.21,1211.26 J3.A4 ; J3.A4 579.23,1073.67 584.79,1068.1 ; 715,625 715,623.86 739.61,599.25 R15.2
  Top Layer w20: B1.4 192.53,991.81 194.34,990 278.03,990 278.35,989.68 315.32,989.68 334.8,989.68 C2.1 ; 584.79,1068.1 590,1068.1 595.56,1073.67 693.67,1073.67 744.33,1124.33 744.33,1309.33 795,1360 R13.1 1052.83,1359.17 1052.83,1336.06 1064.54,1324.34 1123.28,1324.34 1135,1312.63 1135,1135
  Top Layer w30: 1135,1135 1253,1017 R11.1 1658.51,1017 R18.1
  Top Layer w40: C2.1 465,944.49 585.51,944.49 590,940 ; 590,1068.1 590,940 ; 715,625 715,825 679.17,860.83 D5.2 590,875.83 590,940
  Bottom Layer w20: J3.B4 482.76,1142.24 500,1125 555,1125 565,1135 565.53,1135 577.24,1146.72 J3.B9
+5: C4.1 D2.2 D3.1 D4.1 R4.1 R5.2 R6.2 U1.9 U1.10 U2.2 | length 1541.8
  Top Layer w10: D2.2@280,764.61 D2.2 ; 325,650 650.97,650 ; U2.2@706,493.21 712,487.21 U2.2 ; R4.1 1082.22,457.73 1082.22,587.22 1090,595 R6.2 ; R5.2 1231.15,723.15 U1.9 U1.10
  Top Layer w15: 650.97,650 670,630.97 670,505 681.79,493.21 U2.2@706,493.21
  Top Layer w20: D2.2@290,764.61 290,685 325,650 ; D3.1 1065.83,759.25 1108.08,717 R5.2 ; R6.2 1210,595 C4.1
  Top Layer w40: D4.1 990,979.17 990,850.83 1020.87,819.96 1036.61,819.96 1065.83,790.75 D3.1
CC1_IN: J3.A5 R12.1 | length 159.7
  Top Layer w10: R12.1 549.69,1077.76 559.53,1087.61 J3.A5
CC1_OUT: J2.A5 R11.2 | length 118.6
  Top Layer w10: J2.A5 1428.62,1179.68 1428.62,1163.13 1428.48,1163 1428.48,1116.55 1429.76,1115.27 1429.76,1063.24 R11.2
CC2_IN: J3.B5 R14.1 | length 292.1
  Top Layer w10: R14.1 446.76,1294.69 498.5,1242.94 J3.B5
CC2_OUT: J2.B5 R13.2 | length 314.9
  Top Layer w10: R13.2 1266.45,1360 1368.5,1257.94 J2.B5
D+: J2.A6 J2.B6 | length 209.4
  Top Layer w15: v1(1405,1105) 1405,1108.25 1409.84,1113.09 J2.A6
  Bottom Layer w15: J2.B6 1384.25,1129 1405,1108.25 v1(1405,1105)
D-: J2.A7 J2.B7 | length 58.2
  Top Layer w10: J2.A7 1391.06,1181.5 1391.06,1201.39 1415.75,1226.07 J2.B7
GND: B1.2 C1.2 C2.2 C3.2 C4.2 D3.2 D4.2 J1.2 J2.A1 J2.A12 J2.B1 J2.B12 J2.MH1 J2.MH2 J2.MH3 J2.MH4 J3.A1 J3.A12 J3.B1 J3.B12 J3.MH1 J3.MH2 J3.MH3 J3.MH4 Q1.2 R3.1 R7.1 R8.1 R9.1 R10.1 R12.2 R14.2 R17.2 U1.6 U1.11 U1.12 U1.13 | length 194.1
  Top Layer w10: J3.B1 421.91,1211.09 421.91,1165.76 J3.A12 ; J3.A1 638.27,1177.4 640.24,1179.37 J3.B12 ; J2.B1 1291.91,1226.09 1291.91,1180.76 J2.A12 ; J2.A1 1508.27,1226.26 J2.B12
  other v1: 565,180 965,180 1365,180 1765,180 265,380 465,380 865,380 1265,380 1465,380 1665,380 1865,380 365,580 965,580 1565,580 465,780 1865,780 765,980 1165,980 265,1180 865,1180 1665,1180 1865,1180 165,1380 565,1380 1365,1380 1765,1380
NetB1_1: B1.1 D1.1 | length 351.2
  Top Layer w15: B1.1 122.03,900.1 122.03,928.06 130.82,936.85 209.93,936.85 237.8,908.98 237.8,858.62 265.67,830.75 320.75,830.75 D1.1
NetB1_3: B1.3 C3.1 S1.3 | length 709.7
  Top Layer w15: B1.3 191.52,894.78 191.52,816.01 C3.1 190.51,364.49 246.34,308.66 S1.3
NetB1_5: B1.5 R3.2 | length 97
  Top Layer w15: B1.5 118.86,995.35 118.86,1089.17 R3.2
NetC1_1: C1.1 L1.1 R1.2 U1.4 | length 661.5
  Top Layer w10: U1.4 1411.89,723.23 1473.23,723.23 1525,775 1540,775 C1.1 1573.69,791.31 1713.69,791.31 1733,772 R1.2 1733,525.95 L1.1
NetD1_2: D1.2 R2.2 | length 93.3
  Top Layer w20: R2.2 280.18,950.31 280.34,950.16 280.34,877.46 281.26,876.54 281.26,865.75 D1.2
NetD2_1: D2.1 R8.2 | length 78.7
  Top Layer w10: R8.2 339.49,761.11 D2.1
NetJ1_1: J1.1 S1.1 | length 269.1
  Top Layer w15: J1.1 162.6,208.66 S1.1
NetL1_2: L1.2 U1.1 U1.2 | length 225.4
  Top Layer w10: U1.2 U1.1 1430,670 1452.95,647.05 L1.2
NetQ1_1: Q1.1 R18.2 | length 100
  Top Layer w10: R18.2 1690,862.99 1702.87,850.12 1706.81,850.12 1715.59,841.34 Q1.1
NetQ1_3: Q1.3 R1.1 U1.3 | length 361.8
  Top Layer w10: U1.3 1411.89,705.36 1684.14,705.36 1687,702.5 R1.1 ; 1688.5,705.36 1688.5,761.1 Q1.3
NetR4_2: R4.2 R10.2 | length 44
  Top Layer w10: R4.2 R10.2
NetR5_1: R5.1 R7.2 U1.7 | length 123.3
  Top Layer w10: R7.2 R5.1 1229.42,758.58 U1.7
NetR6_1: R6.1 R9.2 | length 90
  Top Layer w15: R9.2 R6.1
NetR15_1: R15.1 R17.1 U2.1 | length 149.6
  Top Layer w10: R15.1 788.74,580.75 R17.1
  Top Layer w20: U2.1 789,486 789,569.51 R17.1
SYS: D5.1 J2.A4 J2.A9 J2.B4 J2.B9 U2.3 | length 3179.7
  Top Layer w10: J2.A9 1351.28,1181.08 1351.28,1226.75 J2.B4 ; J2.B9 1449.21,1226.26 J2.A4 1449.21,1153.96 1498.17,1105 1510,1105
  Top Layer w20: 750,260 U2.3
  Top Layer w40: D5.1 575,435 750,260 1695,260 1795,360 1795,1025 1715,1105 1510,1105
  Bottom Layer w20: J2.B4 1352.76,1115.52 1392.78,1075.5 1417.22,1075.5 1447.24,1105.52 J2.B9
pads on no net: J2.A2 J2.A3 J2.A8 J2.A10 J2.A11 J2.B2 J2.B3 J2.B8 J2.B10 J2.B11 J2.MH5 J2.MH6 J3.A2 J3.A3 J3.A6 J3.A7 J3.A8 J3.A10 J3.A11 J3.B2 J3.B3 J3.B6 J3.B7 J3.B8 J3.B10 J3.B11 J3.MH5 J3.MH6 S1.2 U1.5 U1.8

## Polygon pours and split planes (outlines as drawn)
GND on Top Layer "GND_L01_P000" (solid, pour order 0): 0,1545 -0.1,0 1915,0 1930,15 1930,1544.99
GND on Bottom Layer "GND_L02_P001" (solid, pour order 1): 0,15 0,1545 1930,1545 1930,5 1925,0

## Silkscreen, mask and mechanical layers (free items; w line width, h text height)
Top Overlay:
  drawing of 6 lines, arcs and shapes, not listed
  text "OUT" at 1505,1015.96 h80
  text "IN" at 640,1000 h80
  text "POWER" at 75,485.96 h80
  text "Dual USB-C Li-Po Charging Module v0.01" at 625,48.22 h70

## Text inside footprints (layer, text, board x,y; h text height)
L1: Mechanical 6 "%R" at 1609.37,506.86 h50 r180